# Altium PCB Dev_BRD_STM32F103C8T6.PcbDoc
Units mm, origin at the board's own origin, x right, y up, seen from the top; angles counter-clockwise.
Board outline 26 x 31 mm, 2 copper layers (Top Layer, Bottom Layer); 73 components, 52 nets, 160 pads, 34 vias.
Unrouted connection lines stored in the file: 13.
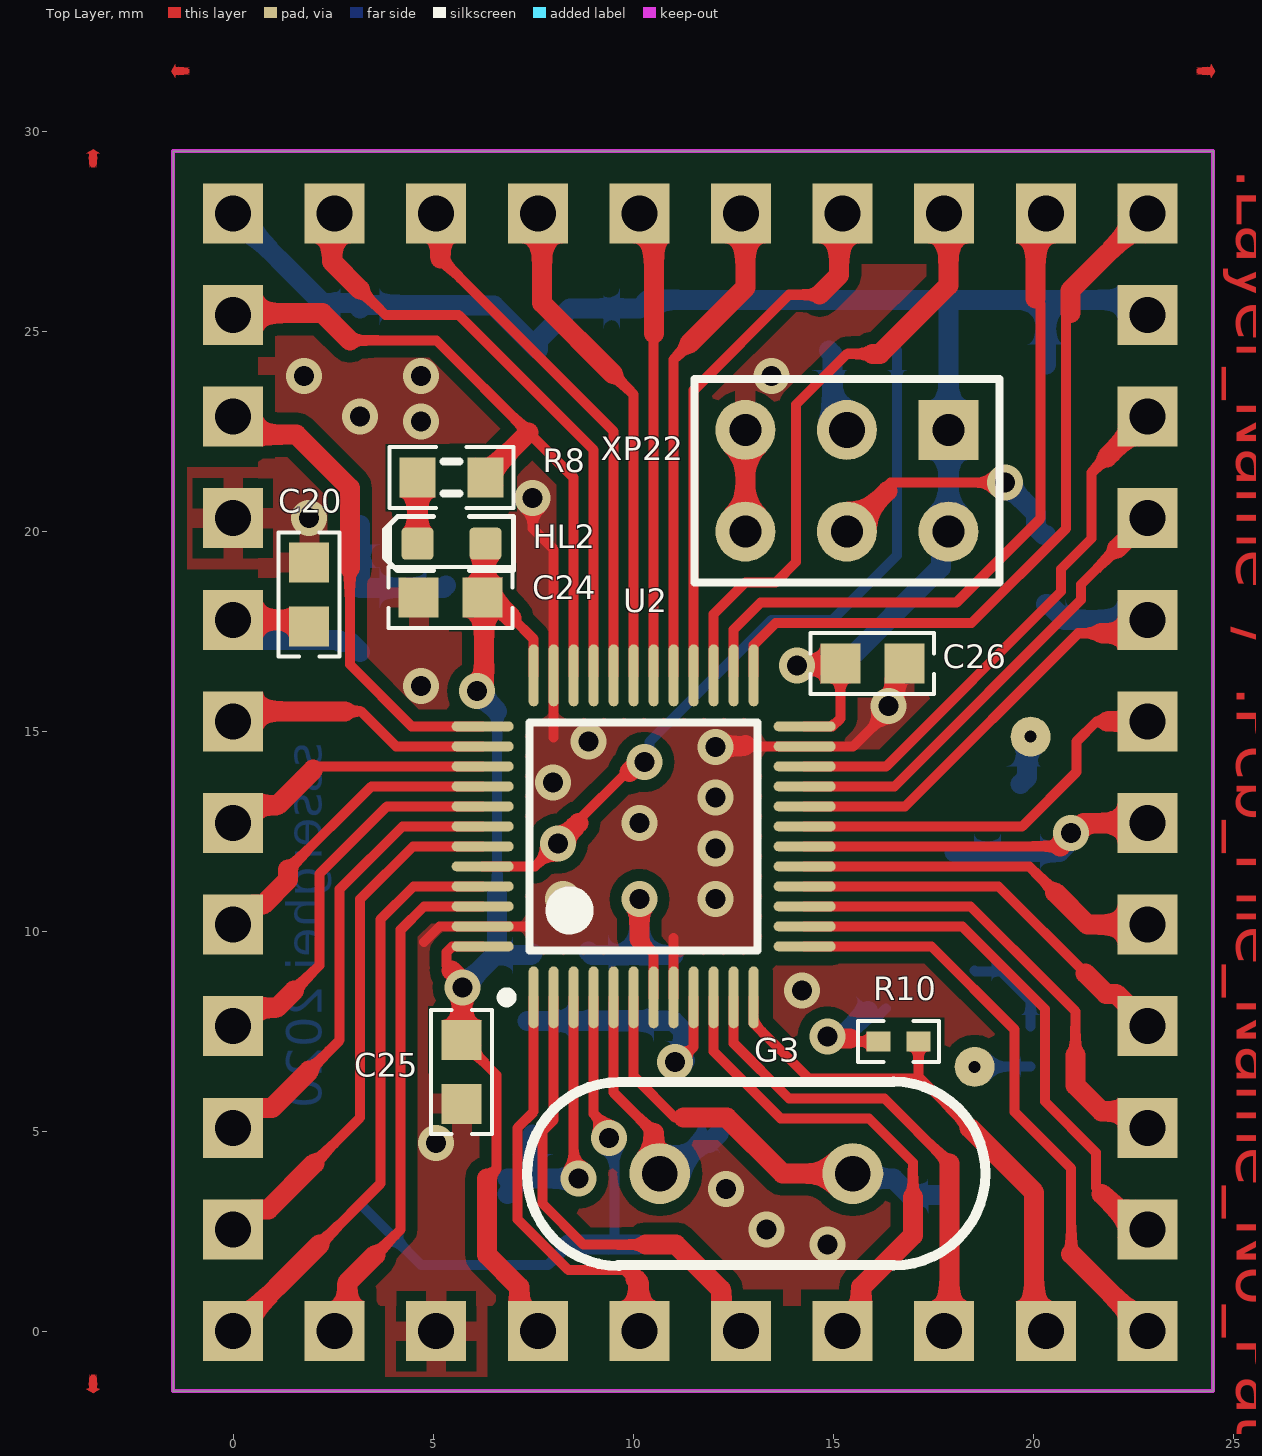
[diagram p0: Top Layer view]
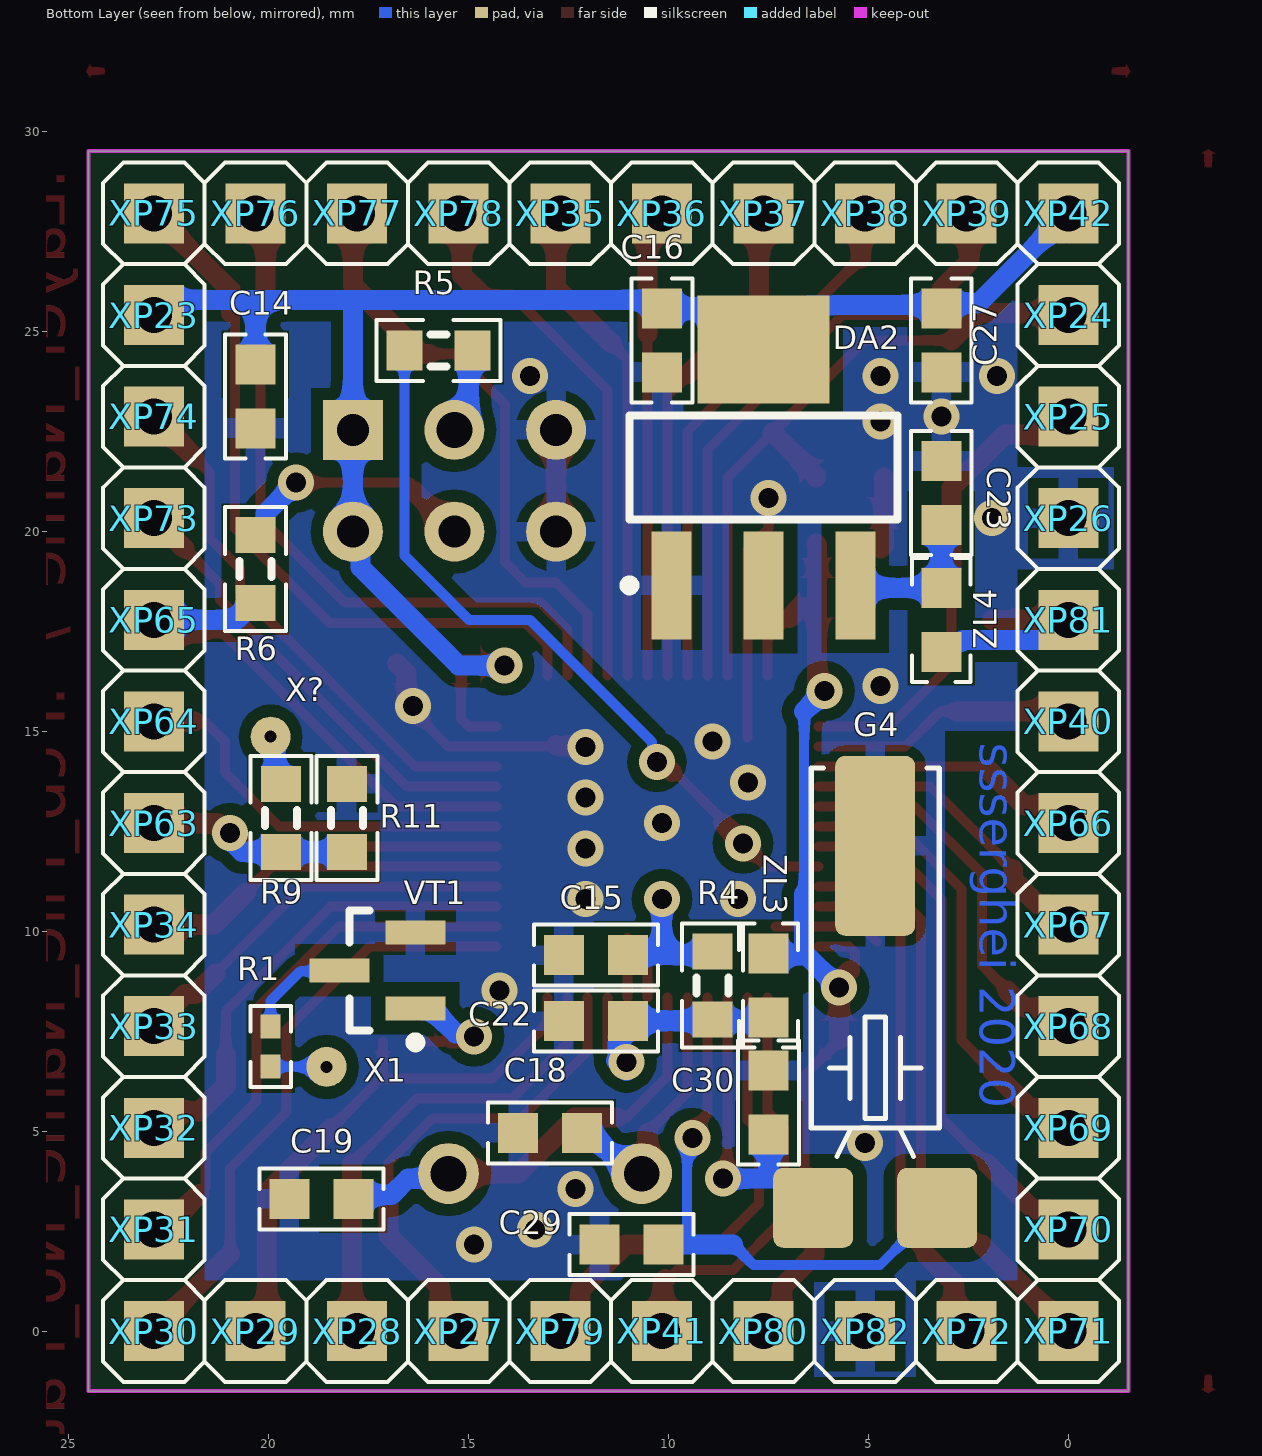
[diagram p1: Bottom Layer view, seen from below]
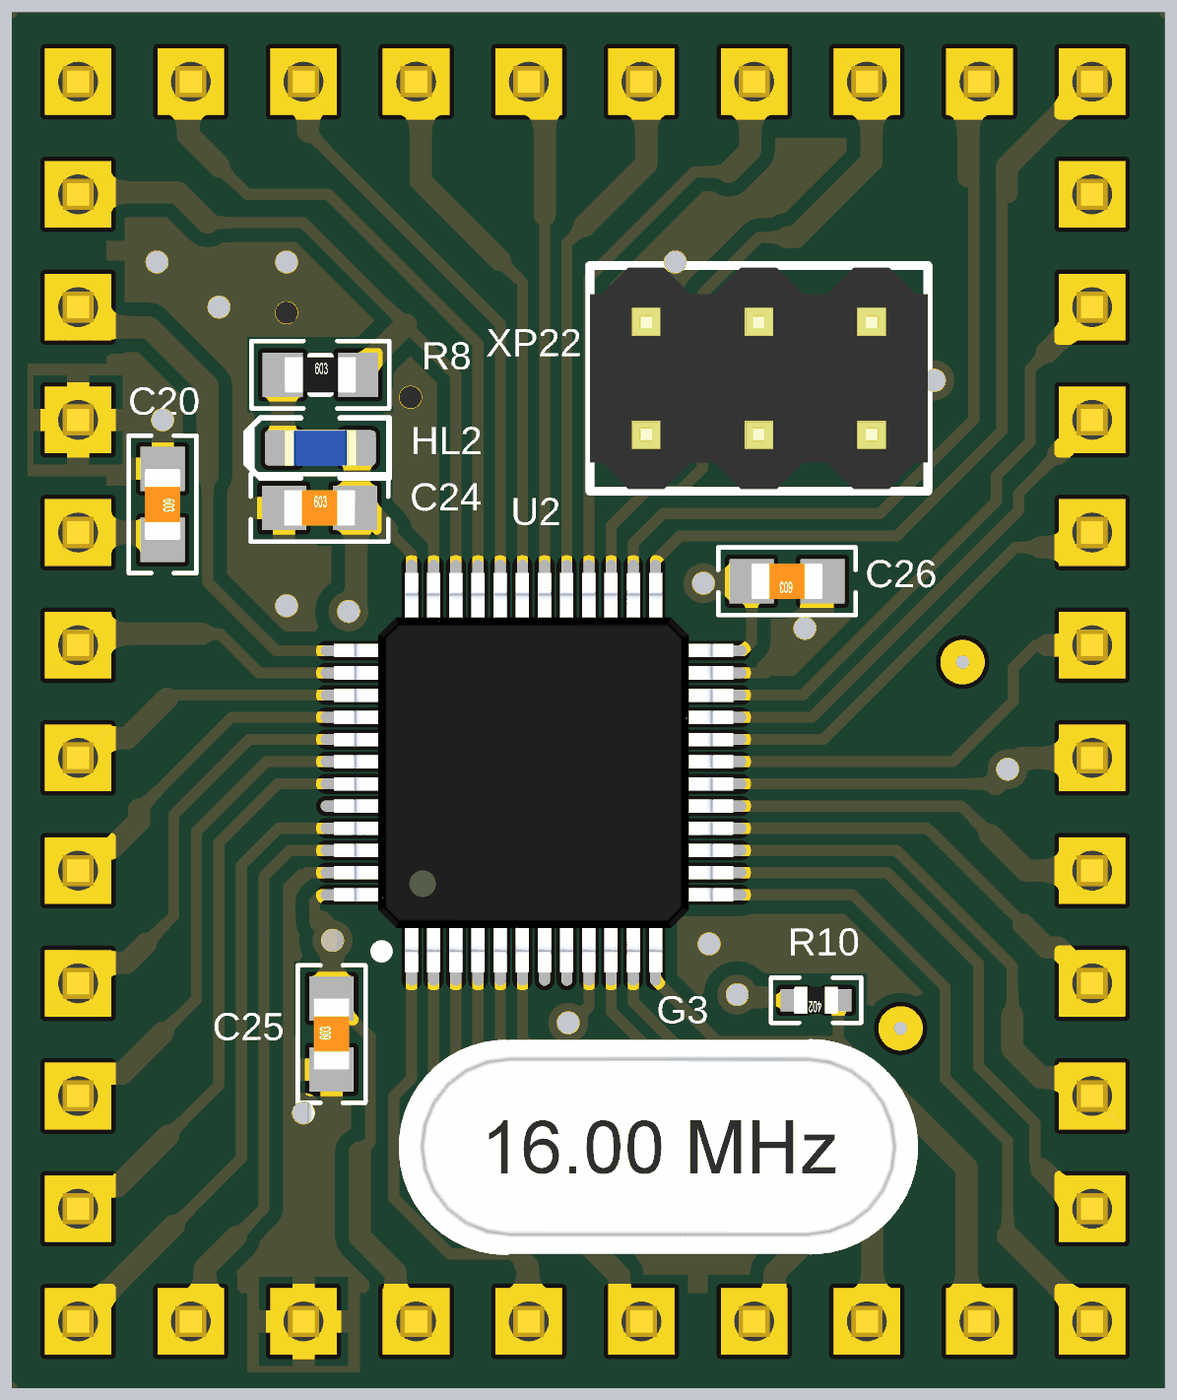
[diagram p2: 3D render of the assembled board from above, using the file's embedded part models]
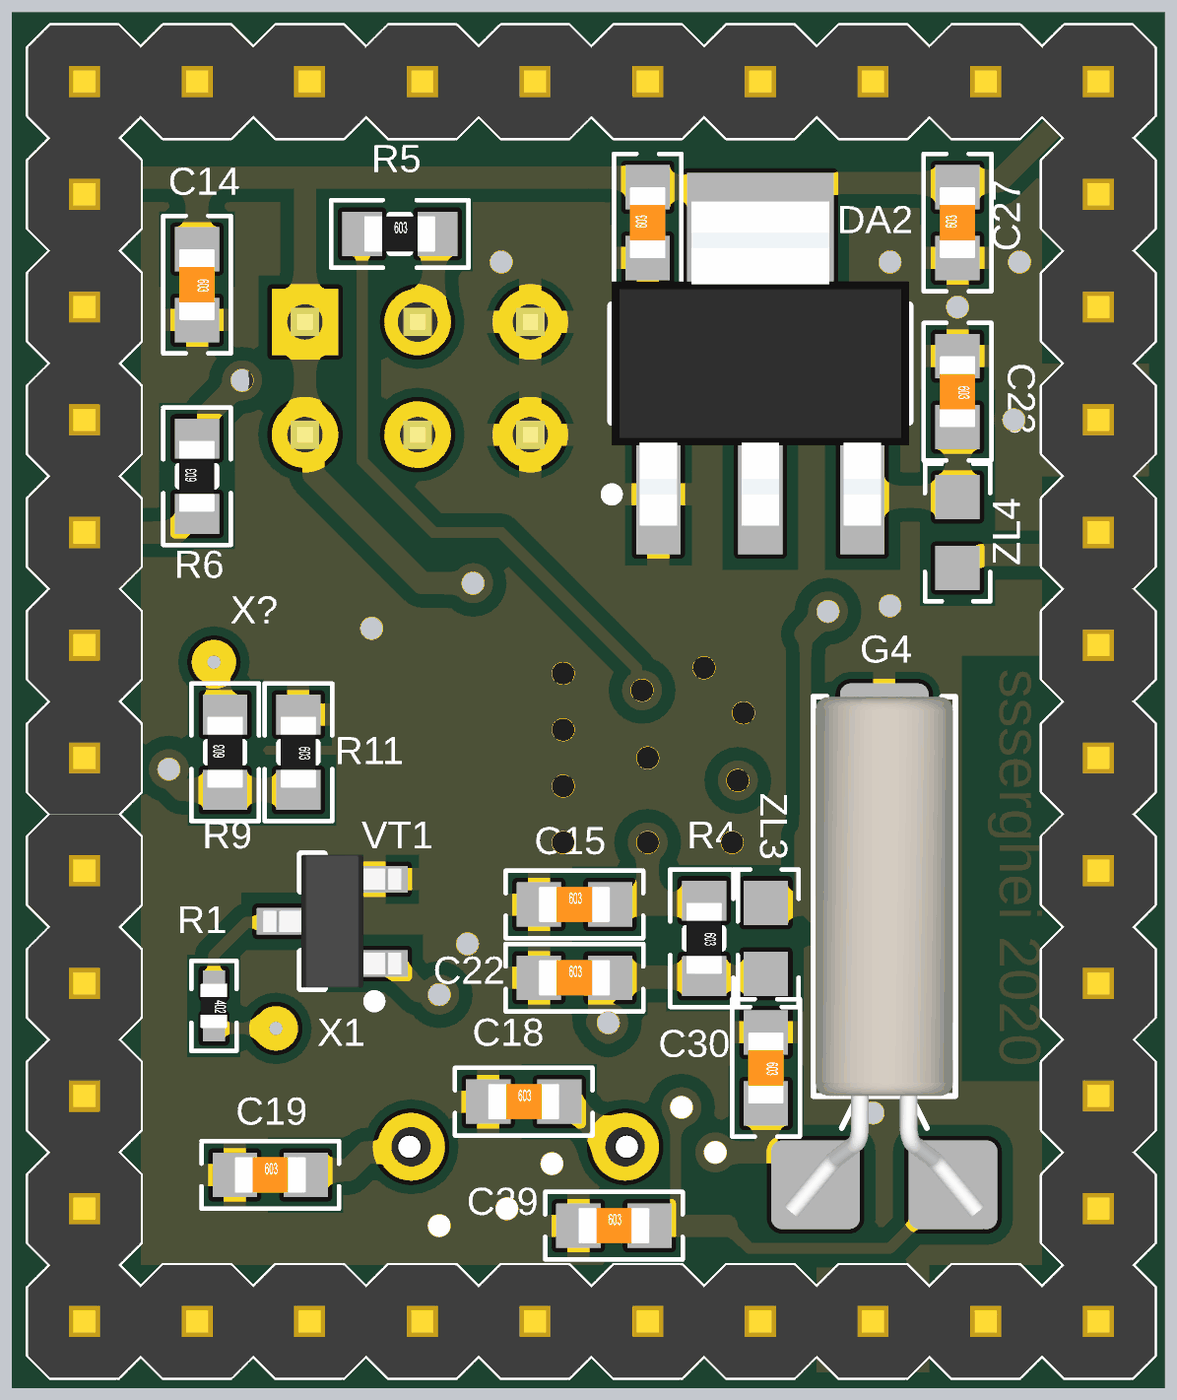
[diagram p3: 3D render of the assembled board from below, using the file's embedded part models]

## Layer stack, top to bottom
Top Solder: solder mask 0.0102, Solder Resist, Dk 3.5
Top Layer: signal copper 0.0356
Dielectric 1: dielectric 0.32, FR-4, Dk 4.8
Bottom Layer: signal copper 0.0356
Bottom Solder: solder mask 0.0102, Solder Resist, Dk 3.5

## Board outline
-1.5,-1.5 -1.5,29.5 24.5,29.5 24.5,-1.5

## Design rules (kind name [scope] priority, off if disabled: settings)
Clearance InPoly [InPoly] p1: gap=0.3 ignorepadtopadclearanceinfootprint=TRUE except(0: Arc-Hole Track-Hole SMDPad-Hole THPad-Hole Via-Hole Fill-Hole Poly-Hole Region-Hole Text-Hole; 0.35: SMDPad-Fill SMDPad-Poly SMDPad-Region)
Clearance [All] p2: gap=0.25 ignorepadtopadclearanceinfootprint=TRUE except(0: Arc-Hole Track-Hole SMDPad-Hole THPad-Hole Via-Hole Fill-Hole Poly-Hole Region-Hole Text-Hole; 0.3: Arc-Via Track-Via)
PolygonConnect [All] p1: thpad.connectstyle=Relief thpad.reliefconductorwidth=0.5 thpad.reliefentries=4 thpad.polygonreliefangle="90 Angle" thpad.airgapwidth=0.254 smdpad.connectstyle=Relief smdpad.reliefconductorwidth=0.5 smdpad.reliefentries=4 smdpad.polygonreliefangle="90 Angle" smdpad.airgapwidth=0.254 via.connectstyle=Direct via.reliefconductorwidth=0.254 via.reliefentries=4 via.polygonreliefangle="90 Angle" via.airgapwidth=0.254
RoutingVias [All] p1: holewidth=0.5 width=0.9 viastyle="Through Hole" minholewidth=0.3 minwidth=0.6 maxholewidth=0.8 maxwidth=1.2
SolderMaskExpansion [All] p1: expansion=0.102 istentingtop=FALSE
Width [All] p1: maxlimit=0.5 minlimit=0.25 preferedwidth=0.25
30 further rules are at their usual default settings.

## Components (designator, comment, footprint, x,y, rotation, side; value= is the part's Value field where it differs from the comment)
C14 "100n" CAPC1608(0603)N 20.32,23.368 r270 bottom
C15 "100n" CAPC1608(0603)N 11.811,9.398 r180 bottom
C16 "10u" CAPC1608(0603)N 10.16,24.765 r90 bottom
C18 "12p" CAPC1608(0603)N 12.954,4.953 r180 bottom
C19 "12p" CAPC1608(0603)N 18.669,3.302 r180 bottom
C20 "10u" CAPC1608(0603)N 1.905,18.415 r270 top
C22 "100n" CAPC1608(0603)N 11.811,7.747 r180 bottom
C23 "100n" CAPC1608(0603)N 3.175,20.955 r270 bottom
C24 "100n" CAPC1608(0603)N 5.44,18.335 r0 top
C25 "100n" CAPC1608(0603)N 5.715,6.477 r90 top
C26 "100n" CAPC1608(0603)N 15.981,16.684 r180 top
C27 "100n" CAPC1608(0603)N 3.175,24.765 r90 bottom
C29 "12p" CAPC1608(0603)N 10.922,2.159 r180 bottom
C30 "12p" CAPC1608(0603)N 7.493,5.715 r270 bottom
DA2 "LD1117S33T" SOT223_M 7.62,21.59 r90 bottom
G3 "8MHz" HC-49/S 10.668,3.937 r0 top
G4 "32.768kHz" CRYSTAL_CMR309T 4.826,5.08 r270 bottom
HL2 "Bl 0603" LED-0603-BLUE 5.461,19.685 r180 top
R1 "10" "REZKemet 0402" 19.939,7.112 r270 bottom
R4 "10k" RESC1608(0603)N 8.89,8.636 r270 bottom
R5 "100k" RESC1608(0603)N 15.748,24.511 r180 bottom
R6 "100k" RESC1608(0603)N 20.32,19.05 r90 bottom
R8 "510" RESC1608(0603)N 5.461,21.336 r0 top
R9 "10k" RESC1608(0603)N 19.685,12.827 r90 bottom
R10 "180 5%" "REZKemet 0402" 16.637,7.239 r180 top
R11 "10k" RESC1608(0603)N 18.034,12.827 r270 bottom
U2 "STM32F103C8T6" LQFP48_L 10.266,12.366 r90 top
VT1 "2N7002NXAKR N-CH  190mА 60V" SOT23-3N 17.272,9.017 r0 bottom
X1 "PLLS1.27-1-R" PLLS1.27-1-R 18.542,6.604 r180 bottom
X? "PLLS1.27-1-R" PLLS1.27-1-R 19.939,14.859 r180 bottom
XP22 "PLD-6" PLD-6-3D 17.886,22.526 r180 top
XP23 "PLS-1" PLS-1-3D 22.86,25.4 r270 bottom
XP24 "PLS-1" PLS-1-3D 0,25.4 r270 bottom
XP25 "PLS-1" PLS-1-3D 0,22.86 r270 bottom
XP26 "PLS-1" PLS-1-3D 0,20.32 r270 bottom
XP27 "PLS-1" PLS-1-3D 15.24,0 r270 bottom
XP28 "PLS-1" PLS-1-3D 17.78,0 r270 bottom
XP29 "PLS-1" PLS-1-3D 20.32,0 r270 bottom
XP30 "PLS-1" PLS-1-3D 22.86,0 r270 bottom
XP31 "PLS-1" PLS-1-3D 22.86,2.54 r270 bottom
XP32 "PLS-1" PLS-1-3D 22.86,5.08 r270 bottom
XP33 "PLS-1" PLS-1-3D 22.86,7.62 r270 bottom
XP34 "PLS-1" PLS-1-3D 22.86,10.16 r270 bottom
XP35 "PLS-1" PLS-1-3D 12.7,27.94 r270 bottom
XP36 "PLS-1" PLS-1-3D 10.16,27.94 r270 bottom
XP37 "PLS-1" PLS-1-3D 7.62,27.94 r270 bottom
XP38 "PLS-1" PLS-1-3D 5.08,27.94 r270 bottom
XP39 "PLS-1" PLS-1-3D 2.54,27.94 r270 bottom
XP40 "PLS-1" PLS-1-3D 0,15.24 r270 bottom
XP41 "PLS-1" PLS-1-3D 10.16,0 r270 bottom
XP42 "PLS-1" PLS-1-3D 0,27.94 r180 bottom
XP63 "PLS-1" PLS-1-3D 22.86,12.7 r180 bottom
XP64 "PLS-1" PLS-1-3D 22.86,15.24 r180 bottom
XP65 "PLS-1" PLS-1-3D 22.86,17.78 r180 bottom
XP66 "PLS-1" PLS-1-3D 0,12.7 r180 bottom
XP67 "PLS-1" PLS-1-3D 0,10.16 r180 bottom
XP68 "PLS-1" PLS-1-3D 0,7.62 r270 bottom
XP69 "PLS-1" PLS-1-3D 0,5.08 r180 bottom
XP70 "PLS-1" PLS-1-3D 0,2.54 r180 bottom
XP71 "PLS-1" PLS-1-3D 0,0 r180 bottom
XP72 "PLS-1" PLS-1-3D 2.54,0 r180 bottom
XP73 "PLS-1" PLS-1-3D 22.86,20.32 r180 bottom
XP74 "PLS-1" PLS-1-3D 22.86,22.86 r180 bottom
XP75 "PLS-1" PLS-1-3D 22.86,27.94 r180 bottom
XP76 "PLS-1" PLS-1-3D 20.32,27.94 r180 bottom
XP77 "PLS-1" PLS-1-3D 17.78,27.94 r180 bottom
XP78 "PLS-1" PLS-1-3D 15.24,27.94 r270 bottom
XP79 "PLS-1" PLS-1-3D 12.7,0 r180 bottom
XP80 "PLS-1" PLS-1-3D 7.62,0 r180 bottom
XP81 "PLS-1" PLS-1-3D 0,17.78 r180 bottom
XP82 "PLS-1" PLS-1-3D 5.08,0 r180 bottom
ZL3 "100u" INDC1608(0603)N 7.493,8.636 r270 bottom
ZL4 "100u" INDC1608(0603)N 3.175,17.78 r90 bottom

## Footprints (in the part's own frame and the unit in brackets; to place one, negate y for a bottom-side part, rotate by r counter-clockwise, add the part's x,y. Pads: shape width x height; smd on the part's side, far side on the other; paste and mask are expansions set on the pad)
CAPC1608(0603)N [mm] "Chip Capacitor, Body 1.6x0.8mm, IPC Medium Density"
  rect 1x1 smd: 1(-0.8,0) 2(0.8,0)
  silkscreen extent -1.55,-0.76 1.55,0.76, body extent -0.8,-0.4 0.8,0.4, height 0.3
CRYSTAL_CMR309T [mm] "SMD Crystal CMR309T package"
  round 0.508 on Mech15: 0(0,0)
  rrect25% 2x2 smd: 1(2,-1.55) 2(2,1.55)
  rrect25% 4.5x2 smd: 3(-7.05,0)
  silkscreen extent -9,-1.6 0.72,1.6, body extent -9,-2.25 2.73,2.25, height 3.07
HC-49/S [mil]
  round 60 hole 35: 1(0,0) 2(190,0)
  silkscreen extent -131,-91 321,91, body extent -128,-92 318,92, height 142
INDC1608(0603)N [mm] "Chip Inductor, Body 1.6x0.8mm, IPC Medium Density"
  rect 1x1 smd: 1(-0.8,0) 2(0.8,0)
  silkscreen extent -1.55,-0.74 1.55,0.74, body extent -0.87,-0.48 0.87,0.48, height 0.71
LED-0603-BLUE [mm]
  round 0.254 on Mech15: 0(0,0)
  rrect25% 0.8x0.8 smd: A(-0.85,0) K(0.85,0)
  Top Layer pour cut-out: -0.5,0.5 0.5,0.5 0.5,-0.5 -0.5,-0.5
  silkscreen extent -1.55,-0.67 1.68,0.67, body extent -0.8,-0.4 0.8,0.4, height 0.75
LQFP48_L [mm] "Thin QFP, 48-Leads, Body 7x7mm, Pitch 0.5mm, IPC High Density"
  oval 1.55x0.25 smd: 1(-4.025,2.75) 2(-4.025,2.25) 3(-4.025,1.75) 4(-4.025,1.25) 5(-4.025,0.75) 6(-4.025,0.25) 7(-4.025,-0.25) 8(-4.025,-0.75) 9(-4.025,-1.25) 10(-4.025,-1.75) 11(-4.025,-2.25) 12(-4.025,-2.75) 25(4.025,-2.75) 26(4.025,-2.25) 27(4.025,-1.75) 28(4.025,-1.25) 29(4.025,-0.75) 30(4.025,-0.25) 31(4.025,0.25) 32(4.025,0.75) 33(4.025,1.25) 34(4.025,1.75) 35(4.025,2.25) 36(4.025,2.75)
  oval 0.25x1.55 smd: 13(-2.75,-4.025) 14(-2.25,-4.025) 15(-1.75,-4.025) 16(-1.25,-4.025) 17(-0.75,-4.025) 18(-0.25,-4.025) 19(0.25,-4.025) 20(0.75,-4.025) 21(1.25,-4.025) 22(1.75,-4.025) 23(2.25,-4.025) 24(2.75,-4.025) 37(2.75,4.025) 38(2.25,4.025) 39(1.75,4.025) 40(1.25,4.025) 41(0.75,4.025) 42(0.25,4.025) 43(-0.25,4.025) 44(-0.75,4.025) 45(-1.25,4.025) 46(-1.75,4.025) 47(-2.25,4.025) 48(-2.75,4.025)
  silkscreen extent -4.15,-2.85 2.85,3.55, body extent -4.5,-4.5 4.5,4.5, height 1.5
PLD-6-3D [mm] "Connector; Header; 3x2 Position"
  rect 1.5x1.5 hole 0.8: 1(0,0)
  round 1.5 hole 0.8: 2(0,2.54) 4(2.54,2.54) 5(5.08,0) 6(5.08,2.54)
  round 1.5 hole 0.9: 3(2.54,0)
  silkscreen extent -1.27,-1.27 6.35,3.81, body extent -1.27,-1.23 6.35,3.77, height 8.4
PLLS1.27-1-R [mm]
  round 1 hole 0.3: 1(0,0)
PLS-1-3D [mm] "Connector; Header; 1 Position"
  rect 1.5x1.5 hole 0.9: 1(0,0)
  silkscreen extent -1.27,-1.27 1.27,1.27, body extent -1.27,-1.27 1.27,1.27, height 8.44
RESC1608(0603)N [mm] "Chip Resistor, Body 1.6x0.8mm, IPC Medium Density"
  rect 0.9x1 smd: 1(-0.85,0) 2(0.85,0)
  silkscreen extent -1.55,-0.76 1.55,0.76, body extent -0.8,-0.4 0.8,0.4, height 0.3
"REZKemet 0402" [mm] "Chip Capacitor, Body 1.0x0.5mm, IPC High Density"
  rect 0.6x0.5 smd: 1(-0.5,0) 2(0.5,0)
  silkscreen extent -1.02,-0.51 1.02,0.51, body extent -0.5,-0.3 0.5,0.3, height 0.2
SOT23-3N [mm] "SOT23, 3-Leads, Body 2.9x1.3mm, Pitch 0.95mm, Lead Span 2.5mm, IPC Medium Density"
  rect 1.5x0.6 smd: 1(-0.95,0.95) 2(-0.95,-0.95) 3(0.95,0)
  silkscreen extent -1.07,-1.5 0.7,1.92, body extent -1.57,-1.5 1.57,1.5, height 1
SOT223_M [mm] "SOT223, 4-Leads, Body 6.5x3.5mm, Pitch 2.3mm, Lead Span 7mm, IPC Low Density"
  rect 2.7x1 smd: 1(-2.95,2.3) 2(-2.95,0) 3(-2.95,-2.3)
  rect 2.7x3.3 smd: 4(2.95,0)
  silkscreen extent -3.07,-3.35 1.3,3.48, body extent -3.65,-3.35 3.65,3.35, height 1.7

## Part data
C14 C15 C16 C18 C19 C20 C22 C23 C24 C25 C26 C27 C29 C30: library part CAPC1608(0603), "?", Digi-Key Part Number=?, HelpURL=?, Manufacturer Part Number=?, Note=?, Package=?, Part Number=CAPC1608(0603), Price$=?
DA2: "LDO Voltage Regulators 3.3V 0.8A Positive", Digi-Key Part Number=?, HelpURL=http://www.mouser.com/ds/2/389/CD00000544-310772.pdf, Manufacturer Part Number=?, Note=?, Package=?, Part Number=LD1117S33T, Price$=?
G3: library part "Crystal HC-49/S", "Crystal HC-49/S", Part Number="Crystal HC-49/S"
G4: library part AB26T-32.768KHZ, "Crystals 32.768KHz", Mouser Part Number=815-AB26T-32.768KHZ, Package="SMD 3pin", HelpURL=https://www.mouser.com/ProductDetail/ABRACON/AB26T-32768KHZ?qs=m%252BUhWDcpCfZq%2FBFfwzExYQ%3D%3D, Manufacturer Part Number=AB26T-32.768KHZ, Part Number=AB26T-32.768KHZ, Price$=0.112
HL2: library part 150060BS55040, "LED BLUE DIFFUSED 0603 SMD", Digi-Key Part Number=732-12013-1-ND, Package=0603, HelpURL=https://www.digikey.com/products/en?keywords=732-12013-1-ND, Manufacturer Part Number=150060BS55040, Part Number=150060BS55040
R1 R10: library part RMCF0402JT180R, "RES SMD 0402 180 5% 100ppm", Digi-Key Part Number=RMCF0402JT180RCT-ND, Package=0402, HelpURL=https://www.digikey.com/product-detail/en/stackpole-electronics-inc/RMCF0402JT180R/RMCF0402JT180RCT-ND/2417840, Manufacturer Part Number=RMCF0402JT180R, Part Number=RMCF0402JT180R, Price$=0.00204
R4 R5 R6 R8 R9 R11: library part RESC1608(0603), Digi-Key Part Number=???, HelpURL=???, Manufacturer Part Number=???, Note=???, Package=???, Part Number=RESC1608(0603), Price$=???
U2: "ARM Microcontrollers - MCU 32BIT Cortex M3 64KB 20KB RAM 2X12 ADC", Mouser Part Number=511-STM32F103C8T6, Package=LQFP-48, ComponentLink1Description="Manufacturer Link", ComponentLink1URL=www.st.com/stm32, ComponentLink2Description=Datasheet, ComponentLink2URL=http://www.st.com/stonline/products/literature/ds/13587.pdf, DatasheetVersion="rev6, Mar-2008", HelpURL=https://www.mouser.co.uk/ProductDetail/STMicroelectronics/STM32F103C8T6?qs=bhCVus9SdFtq6kqxsU5%2FDA%3D%3D, Manufacturer Part Number=STM32F103C8T6, PackageDescription="48-Pin Low-Profile Quad Flat Pack, 7 x 7 mm Body, 0.5 mm Pitch (LQFP48)", PackageReference=LQFP48, PackageVersion=Mar-2008, Part Number=STM32F103C8T6, Price$=2.60, Published=30-May-2008, Publisher="Altium Limited"
VT1: library part 2N7002NXAKR, "N-Channel 60V 190mA (Ta), 300mA (Tc) 265mW (Ta), 1.33W (Tc) Surface Mount TO-236AB", Digi-Key Part Number=1727-8643-1-ND, Package=SOT-23-3, HelpURL=https://www.digikey.com/product-detail/en/nexperia-usa-inc/2N7002NXAKR/1727-8643-1-ND/10416560, Manufacturer Part Number=2N7002NXAKR, Part Number=2N7002NXAKR, Price$=0.01740
XP23 XP24 XP25 XP26 XP27 XP28 XP29 XP30 XP31 XP32 XP33 XP34 XP35 XP36 XP37 XP38 XP39 XP40 XP41 XP42 XP63 XP64 XP65 XP66 XP67 XP68 XP69 XP70 XP71 XP72 XP73 XP74 XP75 XP76 XP77 XP78 XP79 XP80 XP81 XP82: "CONN HEADER VERT 1POS", Digi-Key Part Number=S1011EC-01-ND, Manufacturer Part Number=PRPC001SAAN-RC, HelpURL=https://www.digikey.com/product-detail/en/sullins-connector-solutions/PRPC001SAAN-RC/S1011EC-01-ND/2775253, Note=???, Part Number=PLS-1, Price$=0.05
ZL3 ZL4: library part Ferite1608(0603), "ferite bead", Digi-Key Part Number=???, Manufacturer Part Number=???, Note=???, Package=???, Part Number=Ferite1608(0603), Price$=???
X1 X?: Part Number=PLLS1.27-1-R
XP22: Part Number=PLD-6

## Via types
v1: diameter 0.9, hole 0.5, Top Layer to Bottom Layer, tented both sides, 34 vias

## Nets (pads, with @x,y where several pads share a name; then routed paths per layer and width w, separated by ;. In a path a pad name is that pad's centre, name@x,y a point inside that pad or via, vN(x,y) a via of type N, cw(c..) or ccw(c..) an arc to the next point about the centre after c; other vN are vias at no path point)
+3.3V: C14.1 C16.2 C24.2 C25.2 C26.2 C27.2 DA2.2 DA2.4 HL2.A U2.24 U2.36 U2.48 XP22.1 XP22.2 XP23.1 XP42.1 XP80.1 ZL3.1 | length 68.1
  Top Layer w0.25: 5.461,9.017 5.334,9.144 5.334,9.47 5.48,9.616 U2.48 ; C25.2 6.59,6.402 6.59,4.05 6.35,3.81 ; 6.975,17.838 7.516,17.296 U2.36 ; U2.24 14.989,15.116 15.181,15.308 15.181,16.661 C26.2
  Top Layer w0.5: 5.461,9.017 5.717,8.761 5.717,8.608 v1(5.736,8.589) 5.726,8.578 5.726,7.288 C25.2 ; v1(6.096,16.002) 6.276,16.182 6.276,19.65 HL2.A ; 6.35,3.81 6.35,1.905 7.157,1.098 7.157,0.463 XP80.1 ; C24.2@6.49,18.085 6.706,18.085 6.964,17.827 ; v1(14.097,16.637) 14.121,16.661 C26.2@15.181,16.661
  Bottom Layer w0.25: 6.604,10.922 6.604,15.494
  Bottom Layer w0.5: XP42.1 2.245,25.695 3.045,25.695 C27.2 3.264,25.654 5.871,25.654 5.885,25.64 6.52,25.64 DA2.4 7.62,24.764 8.421,25.565 C16.2 10.376,25.781 17.907,25.781 ; v1(5.736,8.589) 6.545,9.398 ; v1(6.096,16.002) 6.604,15.494 ; 6.604,10.922 6.604,9.457 6.545,9.398 ; ZL3.1 7.455,9.398 6.545,9.398 ; XP80.1 XP80.1@7.62,0.106 ; v1(14.097,16.637) 15.24,16.637 17.695,19.092 17.695,19.795 XP22.2 ; XP22.2@17.78,20.193 17.886,20.299 XP22.1 17.886,25.76 17.907,25.781 ; C14.1 20.32,25.781 ; XP23.1 22.479,25.781 20.32,25.781 ; 17.907,25.781 20.32,25.781
+5V: C20.2 XP81.1 ZL4.1 | length 5.4
  Top Layer w0.5: XP81.1 C20.2@1.905,17.78
  Bottom Layer w0.5: XP81.1 0.5,17.28 0.785,17.28 0.793,17.272 2.632,17.272 2.674,17.23 2.925,17.23 ZL4.1
+VDDA: C22.2 R4.2 U2.9 ZL3.2 | length 9.5
  Top Layer w0.25: v1(11.049,6.731) 11.049,6.64 11.516,7.107 U2.9
  Bottom Layer w0.5: ZL3.2@7.366,7.747 C22.2 ; R4.2 8.909,7.766 10.991,7.766 C22.2 ; v1(11.049,6.731) 11.049,6.504 11.303,6.758 11.261,6.8 11.261,7.497 C22.2
BOOT0: R5.1 U2.44 | length 19
  Top Layer w0.25: U2.44 7.552,11.616 v1(8.128,12.192) ; 8.602,12.734 9.872,14.004
  Top Layer w0.5: v1(8.128,12.192) 8.636,12.7 ; 9.906,13.97 10.137,14.201 10.183,14.201 10.287,14.305 v1(10.287,14.224)
  Bottom Layer w0.25: v1(10.287,14.224) 10.411,14.348 10.411,14.729 13.462,17.78 14.986,17.78 16.598,19.392 R5.1
BOOT1: R6.1 U2.20 XP65.1 | length 13.5
  Top Layer w0.25: U2.20 16.799,13.116 21.129,17.446 21.696,17.446
  Top Layer w0.5: 21.696,17.446 22.526,17.446 XP65.1
  Bottom Layer w0.5: R6.1@20.32,18.161 20.409,18.161 20.79,17.78 XP65.1 XP65.1@22.669,17.971 ; R6.1@20.325,18.178 R6.1@20.348,18.178
divider: R9.1 R11.2 U2.18 XP63.1 | length 12.1
  Top Layer w0.25: U2.18 v1@20.684,12.116
  Top Layer w0.5: v1@20.68,12.112 20.684,12.116 21.268,12.7 XP63.1
  Bottom Layer w0.5: R11.2 20.659,11.977 21.001,12.319 20.955,12.365 v1(20.955,12.446)
GND: C14.2 C15.1 C16.1 C18.1 C19.1 C20.1 C22.1 C23.1 C24.1 C25.1 C26.1 C27.1 C29.1 C30.1 DA2.1 G4.3 R11.1 U2.8 U2.23 U2.35 U2.47 VT1.2 XP22.5 XP22.6 XP26.1 XP82.1 | length 19.2
  Top Layer w0.25: 4.776,9.729 5.163,10.116 U2.47 7.322,10.116 ; v1(7.493,20.828) 7.493,20.066 8.016,19.543 U2.35 8.016,14.844 ; U2.8 11.016,9.826 ; 12.806,14.616 15.505,14.616 16.316,15.427 16.316,15.488 v1@16.449,15.621
  Top Layer w0.5: v1(12.065,14.605) 12.084,14.624 12.778,14.624 12.806,14.652 ; XP22.5 XP22.6 XP22.6@12.933,19.859 ; v1(16.383,15.621) 16.383,15.648 16.548,15.813 16.548,16.451 C26.1
  other v1: 14.859,2.159 13.335,2.54 12.319,3.556 5.08,4.699 14.224,8.509 8.255,10.795 12.065,10.795 12.065,12.065 10.16,12.7 12.065,13.335 8.001,13.716 8.89,14.732 4.699,16.129 1.905,20.32 4.699,22.733 3.175,22.86 1.778,23.876 4.699,23.876 13.462,23.876
NetC18_2: C18.2 G3.1 U2.5 | length 7.6
  Top Layer w0.25: U2.5 9.516,5.957 10.52,4.953 ; 10.393,4.953 10.393,4.365 10.52,4.238 10.668,4.09 G3.1
  Top Layer w0.5: G3.1@10.52,4.238 10.52,4.953
  Bottom Layer w0.5: G3.1 10.945,3.937 11.711,4.703 11.904,4.703 C18.2
NetC19_2: C19.2 G3.2 U2.6 | length 11.1
  Top Layer w0.25: U2.6 10.016,6.367 11.049,5.334 11.263,5.334
  Top Layer w0.5: 11.263,5.334 12.345,5.334 13.742,3.937 G3.2
  Bottom Layer w0.5: G3.2 15.619,3.812 16.508,3.812 16.913,3.407 17.764,3.407 C19.2
NetC23_2: C23.2 DA2.3 ZL4.2 | length 3.7
  Bottom Layer w0.5: C23.2 ZL4.2 5.26,18.58 DA2.3
NetC29_2: C29.2 G4.2 U2.4 | length 14
  Top Layer w0.25: U2.4 9.016,5.43 v1@9.509,4.937
  Bottom Layer w0.25: G4.2 4.705,1.651 7.874,1.651 8.382,2.159 ; 9.398,2.159 9.531,2.292 9.531,4.693 v1(9.398,4.826)
  Bottom Layer w0.5: 8.382,2.159 9.398,2.159 C29.2
NetC30_2: C30.2 G4.1 U2.3 | length 8.2
  Top Layer w0.25: U2.3 8.516,4.071 8.763,3.824 8.749,3.81 v1(8.636,3.81)
  Bottom Layer w0.5: G4.1@6.858,3.429 G4.1@7.239,3.81 ; G4.1@6.858,3.81 G4.1@7.239,3.81 ; C30.2 7.493,3.81 ; v1(8.636,3.81) 7.493,3.81 ; G4.1@7.239,3.81 7.493,3.81
NetHL2_K: HL2.K R8.1 | length 1.8
  Top Layer w0.5: R8.1 4.611,19.646 HL2.K@4.699,19.558
NetR1_1: R1.1 VT1.3 | length 2.4
  Bottom Layer w0.25: VT1.3@18.542,9.017 18.566,8.993 19.201,8.993 19.939,8.255 R1.1
NetR1_2: R1.2 X1.1 | length 1.4
  Bottom Layer w0.25: X1.1@18.546,6.608 19.935,6.608 R1.2
NetR5_2: R5.2 XP22.3 | length 2.2
  Bottom Layer w0.5: R5.2 14.986,24.423 14.986,23.157 15.346,22.797 XP22.3
NetR6_2: R6.2 XP22.4 | length 6.3
  Top Layer w0.25: 16.298,21.066 16.442,21.209 v1(19.304,21.209)
  Top Layer w0.5: XP22.4 16.362,21.002
  Bottom Layer w0.5: v1(19.304,21.209) 20.07,20.443 20.07,20.1 20.27,19.9 R6.2
NetR9_2: R9.2 X?.1 | length 1.3
  Bottom Layer w0.5: R9.2 19.843,13.835 19.843,14.763 X?.1
NetR10_2: R10.2 VT1.1 | length 3
  Top Layer w0.25: 15.494,7.239 R10.2@16.129,7.239
  Top Layer w0.5: v1(14.859,7.366) 14.916,7.309 15.424,7.309
  Bottom Layer w0.25: VT1.1@15.875,7.892 16.147,7.892 VT1.1
  Bottom Layer w0.5: v1(14.859,7.366) 14.936,7.443 15.317,7.443 VT1.1@15.875,8.001
NetU2_2: U2.2 XP79.1 | length 11.9
  Top Layer w0.25: U2.2 8.016,5.277 7.734,4.995 7.734,3.188 8.763,2.159 10.313,2.159
  Top Layer w0.5: 10.313,2.159 11.075,2.159 12.2,1.034 12.2,0.5 XP79.1
NetU2_10: U2.10 XP27.1 | length 12.4
  Top Layer w0.25: U2.10 12.016,6.986 13.692,5.31 15.899,5.31 16.997,4.212 16.997,3.349
  Top Layer w0.5: XP27.1 15.703,0.463 15.703,1.098 16.997,2.392 16.997,3.349
NetU2_11: U2.11 XP28.1 | length 12
  Top Layer w0.25: U2.11 12.516,7.193 13.899,5.81 16.288,5.81 17.907,4.191
  Top Layer w0.5: XP28.1 17.907,0.127 17.907,4.191
NetU2_13: U2.13 XP30.1 | length 15
  Top Layer w0.25: U2.13 17.461,9.616 19.543,7.534 19.543,5.476 20.955,4.064 20.955,1.931
  Top Layer w0.5: 20.955,1.931 22.768,0.118 22.768,0.092 XP30.1
NetU2_14: U2.14 XP31.1 | length 14.5
  Top Layer w0.25: U2.14 18.231,10.116 20.299,8.048 20.299,5.736 21.569,4.466 21.569,3.593 21.725,3.437
  Top Layer w0.5: 21.717,3.429 22.515,2.631 XP31.1@22.769,2.631 ; 22.067,3.095 22.077,3.095 22.085,3.087 22.085,3.061 ; 22.106,3.04 22.36,3.04 XP31.1@22.769,2.631 ; XP31.1 XP31.1@22.769,2.631
NetU2_15: U2.15 XP32.1 | length 11.9
  Top Layer w0.25: U2.15 18.438,10.616 20.543,8.511 21.061,7.993 21.061,6.905
  Top Layer w0.5: 21.061,6.905 21.061,6.143 21.712,5.492 22.448,5.492 XP32.1
NetU2_16: U2.16 XP33.1 | length 10
  Top Layer w0.25: U2.16 19.136,11.116 19.186,11.066 19.189,11.066 21.316,8.938
  Top Layer w0.5: 21.315,8.937 21.823,8.429 22.077,8.429 22.768,7.738 22.768,7.712 XP33.1
NetU2_17: U2.17 XP34.1 | length 9.2
  Top Layer w0.25: U2.17 19.906,11.616 20.553,10.969
  Top Layer w0.5: 20.553,10.969 21.362,10.16 XP34.1
NetU2_19: U2.19 XP64.1 | length 10.1
  Top Layer w0.25: U2.19 19.728,12.616 21.082,13.97 21.082,14.732 21.59,15.24 21.844,15.24
  Top Layer w0.5: 21.844,15.24 XP64.1
NetU2_21: U2.21 XP73.1 | length 11.6
  Top Layer w0.25: U2.21 16.537,13.616 21.201,18.28 21.201,18.661 22.098,19.558
  Top Layer w0.5: 22.098,19.558 XP73.1
NetU2_22: U2.22 XP74.1 | length 13.5
  Top Layer w0.25: U2.22 16.33,14.116 20.701,18.487 20.701,19.05 21.463,19.812 21.463,21.463 21.844,21.844
  Top Layer w0.5: 21.844,21.844 XP74.1
NetU2_25: U2.25 XP75.1 | length 18.5
  Top Layer w0.25: U2.25 13.016,17.148 13.568,17.7 18.462,17.7 20.828,20.066 20.828,25.341 20.934,25.447
  Top Layer w0.5: 20.934,25.447 20.934,26.014 XP75.1
NetU2_26: U2.26 XP76.1 | length 17.8
  Top Layer w0.25: U2.26 12.516,17.537 13.187,18.208 18.081,18.208 20.193,20.32 20.193,25.68 20.066,25.807
  Top Layer w0.5: 20.066,25.807 20.066,27.686 XP76.1
NetU2_27: U2.27 XP77.1 | length 15
  Top Layer w0.25: U2.27 12.016,17.926 12.806,18.716 13.568,18.716 14.076,19.224 14.076,23.161 15.346,24.431 15.981,24.431
  Top Layer w0.5: 15.981,24.431 16.176,24.431 17.886,26.141 17.886,27.834 XP77.1
NetU2_28: U2.28 XP78.1 | length 13.5
  Top Layer w0.25: U2.28 11.516,23.522 13.902,25.908 14.664,25.908
  Top Layer w0.5: 14.664,25.908 15.155,26.399 15.155,27.715 15.24,27.8 XP78.1
NetU2_29: U2.29 XP35.1 | length 12.3
  Top Layer w0.25: U2.29 11.016,24.292 11.409,24.685
  Top Layer w0.5: 11.409,24.685 12.806,26.082 12.806,27.834 XP35.1
NetU2_30: U2.30 XP36.1 | length 11.7
  Top Layer w0.25: U2.30 10.516,24.939
  Top Layer w0.5: XP36.1 10.52,27.58 10.52,24.939
NetU2_31: U2.31 XP37.1 | length 12.5
  Top Layer w0.25: 9.504,23.923 10.016,23.411 U2.31
  Top Layer w0.5: XP37.1 7.726,27.834 7.726,25.701 9.504,23.923
NetU2_38: U2.38 XP40.1 | length 6.7
  Top Layer w0.25: 2.794,15.494 3.201,15.494 4.079,14.616 U2.38
  Top Layer w0.5: XP40.1 0.254,15.494 2.794,15.494
NetU2_39: U2.39 XP66.1 | length 6.7
  Top Layer w0.25: 2.085,14.116 U2.39
  Top Layer w0.5: XP66.1 0.446,13.146 1.115,13.146 2.002,14.033
NetU2_40: U2.40 XP67.1 | length 7.8
  Top Layer w0.25: 1.376,11.536 3.456,13.616 5.591,13.616 U2.40
  Top Layer w0.5: XP67.1 0.5,10.66 0.754,10.66 1.376,11.282 1.376,11.536
NetU2_41: U2.41 XP68.1 | length 9.9
  Top Layer w0.25: 1.524,8.509 2.159,9.144 2.159,11.43 3.845,13.116 U2.41
  Top Layer w0.5: XP68.1 0.463,8.083 1.098,8.083 1.524,8.509
NetU2_42: U2.42 XP69.1 | length 11.6
  Top Layer w0.25: 1.905,6.508 2.667,7.27 2.667,11.049 4.234,12.616 U2.42
  Top Layer w0.5: XP69.1 0.5,5.58 0.977,5.58 1.905,6.508
NetU2_43: U2.43 XP70.1 | length 13.4
  Top Layer w0.25: 2.032,4.191 3.175,5.334 3.175,10.795 4.496,12.116 U2.43
  Top Layer w0.5: XP70.1 0.5,3.04 0.881,3.04 2.032,4.191
NetU2_45: U2.45 XP71.1 | length 14.7
  Top Layer w0.25: 2.159,2.159 3.683,3.683 3.683,10.287 4.512,11.116 U2.45
  Top Layer w0.5: XP71.1 2.159,2.159
NetU2_46: U2.46 XP72.1 | length 13
  Top Layer w0.25: 3.556,1.905 4.191,2.54 4.191,10.033 4.774,10.616 U2.46
  Top Layer w0.5: XP72.1 2.858,0.318 2.858,1.207 3.556,1.905
nRST: C15.2 R4.1 U2.7 | length 6.2
  Top Layer w0.25: 10.16,9.805 10.516,9.449 U2.7
  Top Layer w0.5: 10.16,9.805 v1(10.16,10.795)
  Bottom Layer w0.5: R4.1 8.978,9.398 10.16,9.398 ; v1(10.16,10.795) 10.16,9.398 ; C15.2 10.16,9.398
SWDCLK: U2.37 XP25.1 | length 12
  Top Layer w0.25: 2.921,19.076 2.921,16.663 4.468,15.116 U2.37
  Top Layer w0.5: XP25.1 0.453,22.407 1.587,22.407 2.921,21.073 2.921,19.076
SWDIO: R8.2 U2.34 XP24.1 | length 16.8
  Top Layer w0.25: 2.921,24.765 5.085,24.765 7.432,22.418 8.516,21.334 U2.34
  Top Layer w0.5: XP24.1 0.047,25.447 2.239,25.447 2.921,24.765 ; R8.2 6.311,21.386 6.511,21.586 7.388,22.463
Tranz: R10.1 U2.12 XP29.1 | length 13.9
  Top Layer w0.25: U2.12 13.016,7.691 14.397,6.31 17.185,6.31 18.415,5.08 ; 17.137,6.381 R10.1
  Top Layer w0.5: 18.415,5.08 20.028,3.467 20.028,0.292 XP29.1
USB_D+: U2.33 XP39.1 | length 15.4
  Top Layer w0.25: 3.175,26.035 3.81,25.4 5.643,25.4 9.016,22.027 U2.33
  Top Layer w0.5: XP39.1 2.477,27.877 2.477,26.733 3.175,26.035
USB_D-: U2.32 XP38.1 | length 13.4
  Top Layer w0.25: 5.186,26.818 9.516,22.488 U2.32
  Top Layer w0.5: XP38.1 5.186,27.834 5.186,26.818
V_bat: U2.1 XP41.1 | length 10.6
  Top Layer w0.25: U2.1 7.516,5.484 7.112,5.08 7.112,2.794 8.382,1.524 9.779,1.524 10.033,1.27
  Top Layer w0.5: 10.067,1.304 10.139,1.231 10.139,0.021 XP41.1
pads on no net: G4.0 HL2.0

## Polygon pours and split planes (outlines as drawn)
GND on Top Layer "GND_L01_P023" (solid, remove dead copper, pour order 23): -1.27,21.59 1.27,21.59 1.27,19.05 -1.27,19.05
GND on Top Layer "GND_L01_P022" (solid, remove dead copper, pour order 22): 3.81,1.27 6.35,1.27 6.35,-1.27 3.81,-1.27
no net on Top Layer "NONET_L01_P013" (solid, remove dead copper, pour order 13): 29.316,22.526
GND on Top Layer "GND_L01_P015" (solid, remove dead copper, pour order 15): 0.635,0.635 0.635,26.67 22.225,26.67 22.225,0.635
no net on Top Layer "NONET_L01_P017" (solid, remove dead copper, pour order 17): 50.906,-4.144
no net on Top Layer "NONET_L01_P019" (solid, remove dead copper, pour order 19): 48.366,13.636
no net on Top Layer "NONET_L01_P018" (solid, remove dead copper, pour order 18): 16.51,13.97
no net on Top Layer "NONET_L01_P016" (solid, remove dead copper, pour order 16): 19.05,-3.81
no net on Top Layer "NONET_L01_P012" (solid, remove dead copper, pour order 12): -2.54,22.86
GND on Bottom Layer "GND_L02_P026" (solid, remove dead copper, pour order 26): 3.81,1.27 6.35,1.27 6.35,-1.27 3.81,-1.27
GND on Bottom Layer "GND_L02_P025" (solid, remove dead copper, pour order 25): -1.27,21.59 1.27,21.59 1.27,19.05 -1.27,19.05
GND on Bottom Layer "GND_L02_P021" (solid, remove dead copper, pour order 21): 1.27,1.27 1.27,26.67 21.59,26.67 21.59,1.27

## Keep-outs
Keep-Out Layer:
  the board outline again, w0.1

## Other copper
Top Layer:
  text "'.Layer_Name' / '.Pcb_File_Name_No_Path'" at 24.703,29.5 h2 r270
Bottom Layer:
  text "'.Layer_Name' / '.Pcb_File_Name_No_Path'" at 28.297,29.5 h2 r90
  text "ssserghei 2020" at 2.5,14.71 h1.5 r90

## Dimensions
-1.5,29.5 to -1.5,-1.5 on Top Layer
-1.5,29.5 to 24.5,29.5 on Top Layer